# Altium PCB 学生电源.PcbDoc
Units mil, origin at the board's own origin, x right, y up, seen from the top; angles counter-clockwise.
Board outline 6000 x 4000 mil, 2 copper layers (Top Layer, Bottom Layer); 22 components, 9 nets, 50 pads, 0 vias.
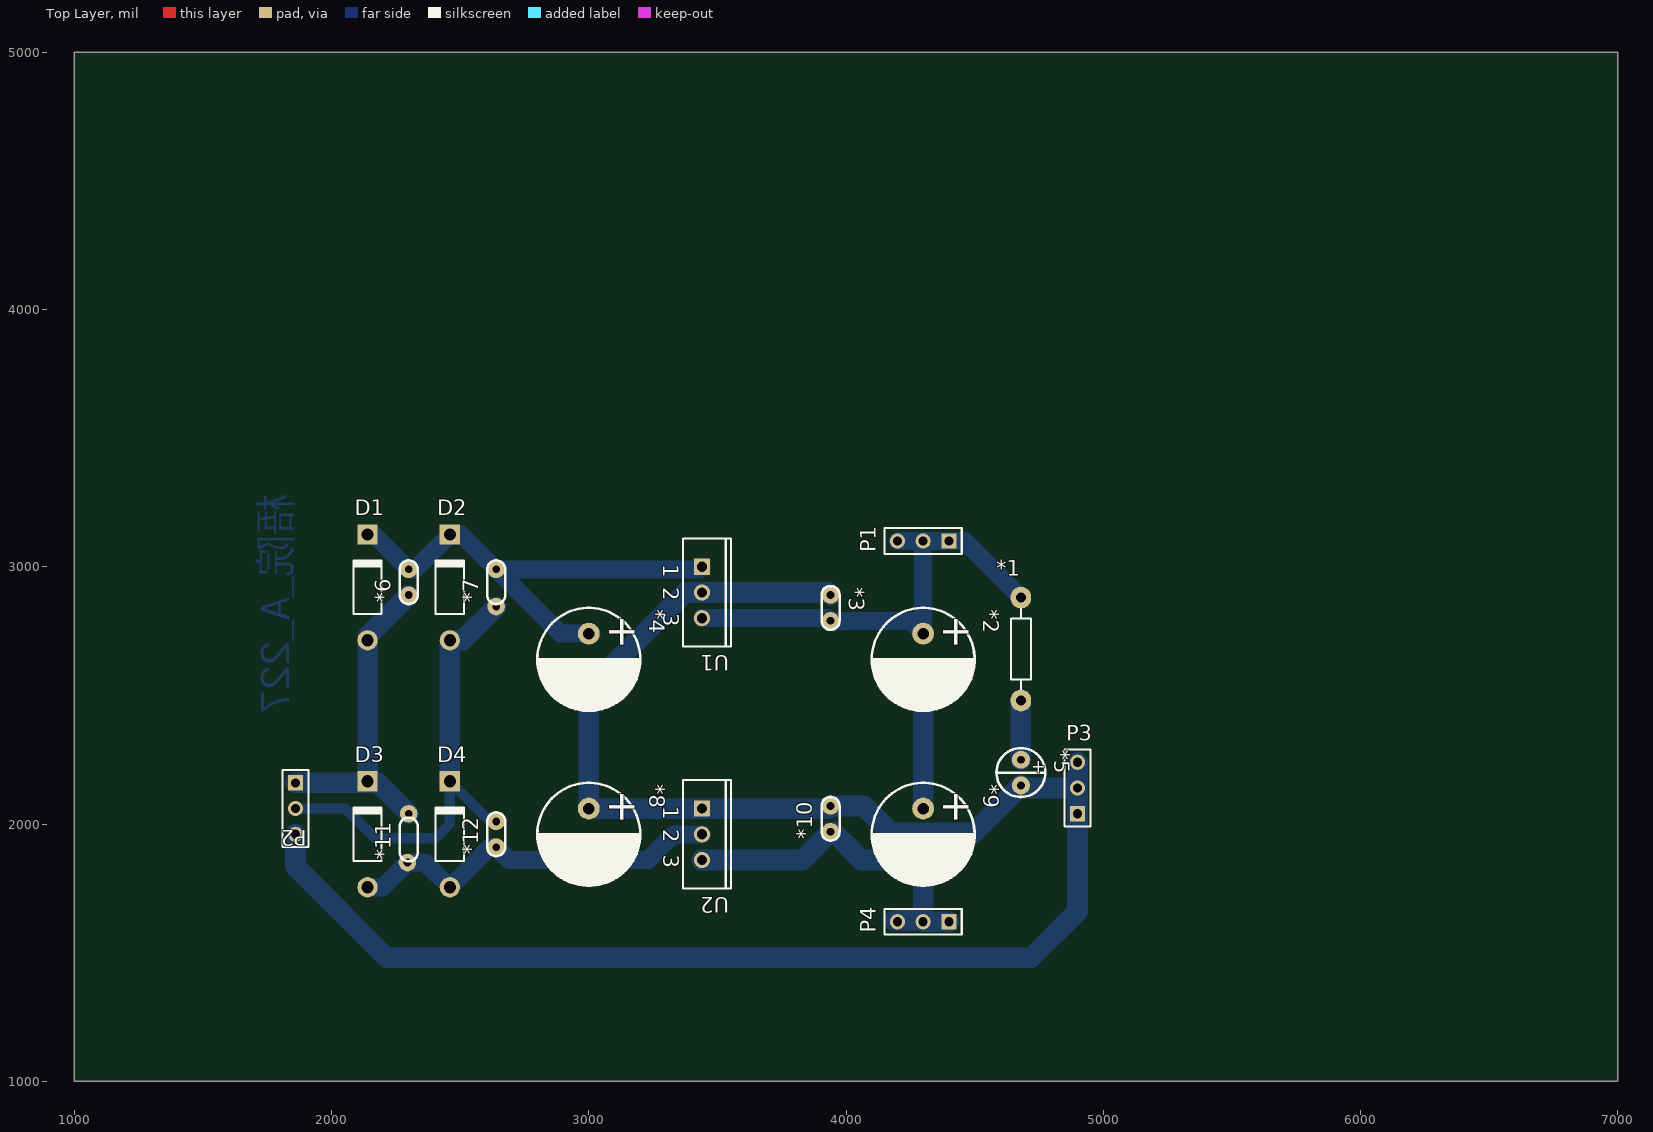
[diagram p0: Top Layer view]
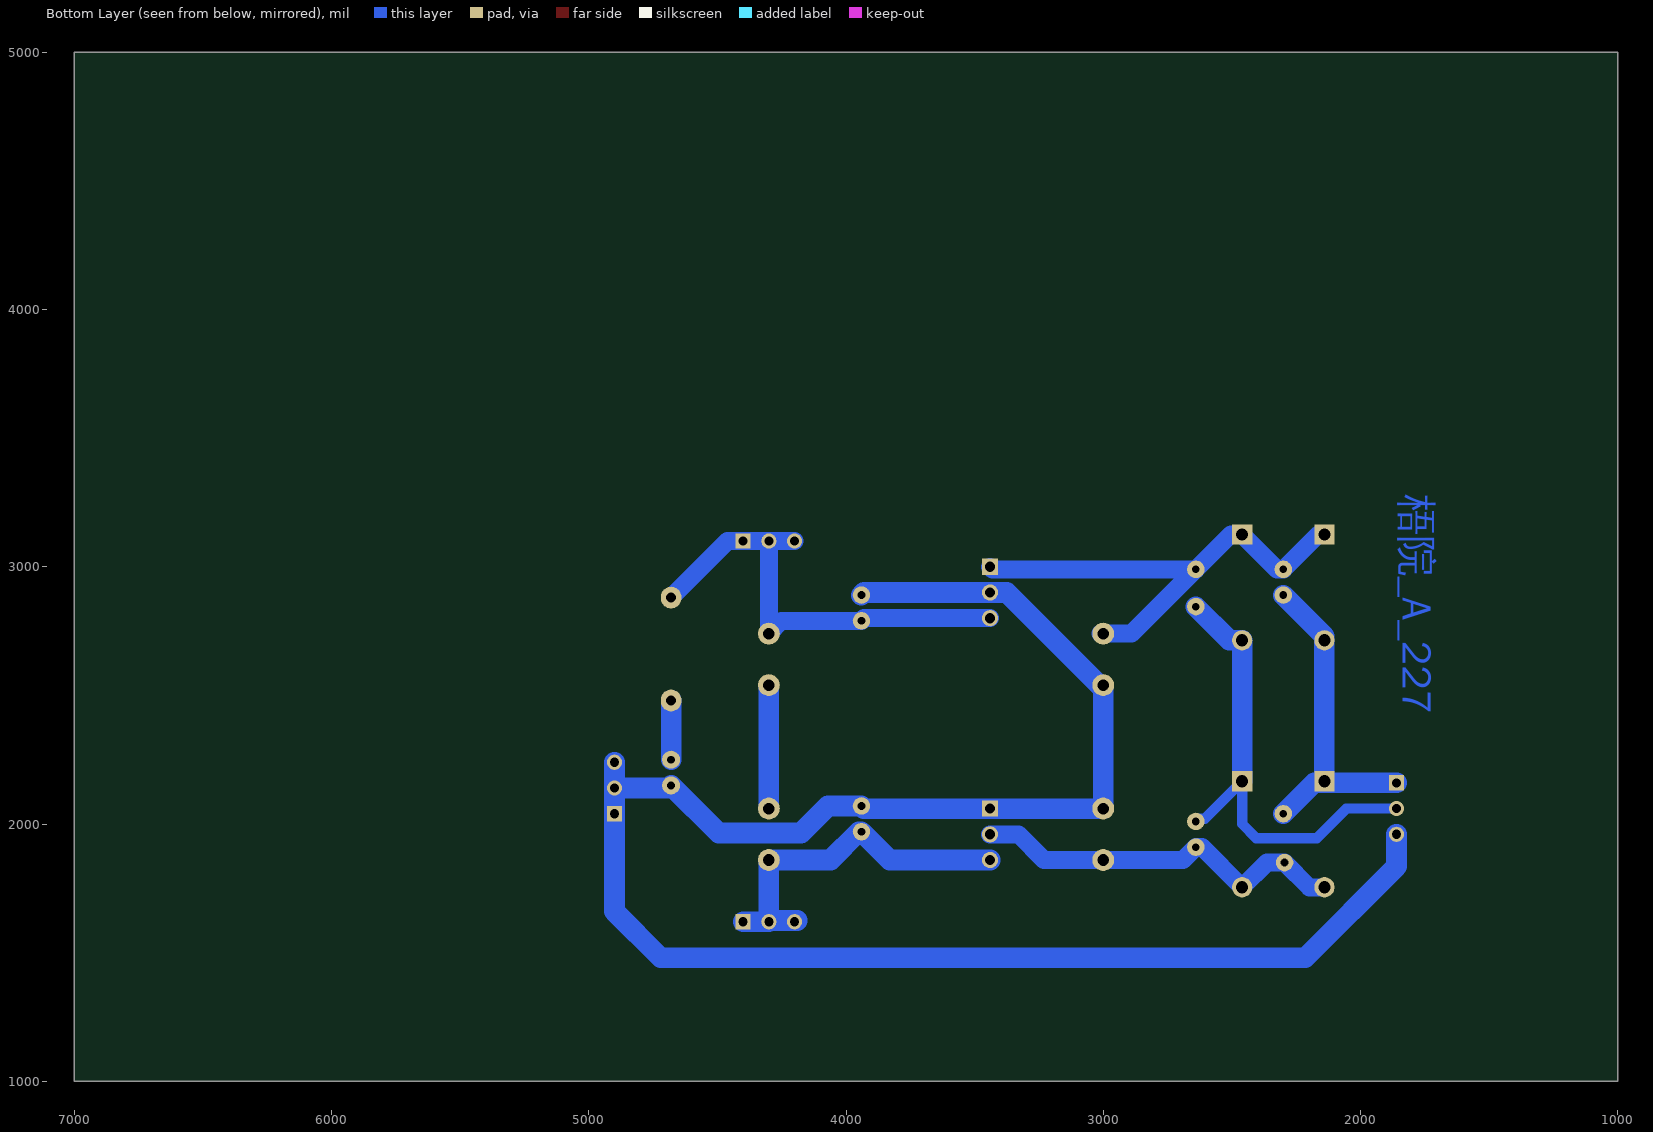
[diagram p1: Bottom Layer view, seen from below]

## Layer stack, top to bottom
Top Layer: signal copper 1.4
Dielectric: dielectric 12.6, FR-4, Dk 4.8
Bottom Layer: signal copper 1.4

## Board outline
1000,1000 7000,1000 7000,5000 1000,5000

## Design rules (kind name [scope] priority, off if disabled: settings)
Clearance [All] p1: gap=10
ComponentClearance [All] p1: gap=10 collisioncheckmode=3 verticalgap=10
PolygonConnect [All] p1: connectstyle=Relief reliefconductorwidth=10 reliefentries=4 polygonreliefangle="90 Angle"
RoutingVias [All] p1: holewidth=28 width=50 viastyle="Through Hole" minholewidth=28 minwidth=50 maxholewidth=28 maxwidth=50
SolderMaskExpansion [All] p1: expansion=4
TestPointUsage [All] p1: valid=0 allowmultiple=FALSE
Testpoint [All] p1: side=15 testpointundercomponent=TRUE minsize=40 maxsize=100 preferedsize=60 minholesize=0 maxholesize=40 preferedholesize=32 testpointgrid=1 style=1023 order=0-112345678
Width [All] p1: maxlimit=100 minlimit=10 preferedwidth=10 minimp=50.000000 maximp=50.000000 favimp=50.000000
18 further rules are at their usual default settings.

## Components (designator, comment, footprint, x,y, rotation, side; value= is the part's Value field where it differs from the comment)
*1 "R" RES 4680,2480 r90 top
*2 "C-DJ" 电解电容-10mm 4300,2640 r270 top
*3 "C-CP" 瓷片电容#1 3940,2840 r270 top
*4 "C-DJ" 电解电容-10mm 3000,2640 r270 top
*5 "LED-CS" LED-5 4680,2200 r270 top
*6 "C-CP" 瓷片电容#1 2300,2940 r90 top
*7 "C-CP" 瓷片电容#2 2640,2940 r90 top
*8 "C-DJ" 电解电容-10mm 3000,1960 r270 top
*9 "C-DJ" 电解电容-10mm 4300,1960 r270 top
*10 "C-CP" 瓷片电容#1 3940,2020 r90 top
*11 "C-CP" 瓷片电容#3 2300,1940 r90 top
*12 "C-CP" 瓷片电容#1 2640,1960 r90 top
D1 "Diode 1N4007" DO-41 2140,2920 r90 top
D2 "Diode 1N4007" DO-41 2460,2920 r90 top
D3 "Diode 1N4007" DO-41 2140,1960 r90 top
D4 "Diode 1N4007" DO-41 2460,1960 r90 top
P1 "Header 3" HDR1X3 4400,3100 r180 top
P2 "Header 3" HDR1X3 1860,2160 r270 top
P3 "Header 3" HDR1X3 4900,2040 r90 top
P4 "Header 3" HDR1X3 4400,1620 r180 top
U1 "LM7805CT" T03B 3440,2900 r270 top
U2 "LM7905CT" T03B 3440,1960 r270 top

## Footprints (in the part's own frame and the unit in brackets; to place one, negate y for a bottom-side part, rotate by r counter-clockwise, add the part's x,y. Pads: shape width x height; smd on the part's side, far side on the other; paste and mask are expansions set on the pad)
DO-41 [mm] "Diode, Axial; Body 5.2 x 2.7 mm (LxDia. max), Lead Dia. 0.86 mm (max)"
  round 2 hole 1.2: 1(-5.23,0)
  rect 2x2 hole 1.2: 2(5.23,0)
  silkscreen extent -2.65,-1.41 2.75,1.4
HDR1X3 [mm] "Connector; Header; 3 Position"
  rect 1.5x1.5 hole 0.9: 1(0,0)
  round 1.5 hole 0.9: 2(2.54,0) 3(5.08,0)
  silkscreen extent -1.27,-1.27 6.35,1.27
LED-5 [mil]
  round 70 hole 30: 1(-50,0) 2(50,0)
  silkscreen extent -95,-95 95,95
RES [mil]
  oval 85x80 hole 39.37: 1(0,0) 2(400,0)
  silkscreen extent 43,-39 357,39
T03B [mm] "TO, Thru-Hole, Vertical, Heatsink Mounted; 3 In-Line Leads; Pitch 2.54 mm"
  rect 1.6x1.6 hole 1: 1(-2.54,0)
  round 1.6 hole 1: 2(0,0) 3(2.54,0)
  silkscreen extent -5.35,-1.85 5.35,2.85
瓷片电容#1 [mil]
  round 68 hole 30: 1(-50,0) 2(50,0)
  silkscreen extent -85,-35 85,35
瓷片电容#2 [mil]
  round 68 hole 30: 1(-95,0) 2(50,0)
  silkscreen extent -85,-35 85,35
瓷片电容#3 [mil]
  round 68 hole 30: 1(-90,5) 2(100,0)
  silkscreen extent -85,-35 85,35
电解电容-10mm [mil]
  round 85 hole 45: 1(-100,0) 2(100,0)
  silkscreen extent -200,-200 200,200

## Part data
D1 D2 D3 D4: "1 Amp General Purpose Rectifier"
P1 P3 P4: "Header, 3-Pin"
P2: library part "Header 2", "Header, 2-Pin"
U1: "Series 3-Terminal Positive Regulator"
U2: "3-Terminal Negative Regulator"

## Nets (pads, with @x,y where several pads share a name; then routed paths per layer and width w, separated by ;. In a path a pad name is that pad's centre, name@x,y a point inside that pad or via, vN(x,y) a via of type N, cw(c..) or ccw(c..) an arc to the next point about the centre after c; other vN are vias at no path point)
GND: *3.1 *4.2 *5.2 *8.1 *10.2 P2.3 P3.1 P3.2 P3.3 U1.2 U2.1 | length 7574.5
  Bottom Layer w80: P2.3 1860,1835 2215,1480 4720,1480 4900,1660 P3.3 ; *4.2@3000,2525 3375,2900 3930,2900 *3.1 ; *4.2 *8.1 3930,2060 *10.2 4070,2070 4175,1965 4495,1965 *5.2 4690,2140 P3.2
Net*1_1: *1.1 *5.1 | length 230
  Bottom Layer w80: *5.1 *1.1
Net*1_2: *1.2 *2.1 *3.2 P1.1 P1.2 P1.3 U1.3 | length 1816
  Bottom Layer w70: U1.3 3930,2800 *3.2 4250,2790 *2.1 P1.2 ; P1.3 P1.2 ; *1.2 4460,3100 P1.1 P1.2
Net*2_2: *2.2 *9.1 | length 480
  Bottom Layer w80: *9.1 *2.2
Net*4_1: *4.1 *6.2 *7.2 D1.2 D2.2 U1.1 | length 1946.6
  Bottom Layer w70: D1.2 2164.09,3125.91 *6.2 2324.09,2990 D2.2 2504.09,3125.91 2890,2740 *4.1@3010,2740 ; *7.2 3430,2990 U1.1
Net*6_1: *6.1 *11.2 D1.1 D3.2 P2.1 | length 1288.4
  Bottom Layer w80: P2.1 2180,2160 *11.2 ; D3.2@2134.09,2160 D3.2 2140,2730 *6.1
Net*7_1: *7.1 *12.2 D2.1 D4.2 P2.2 | length 1849.2
  Bottom Layer w40: P2.2 2055,2060 2170,1945 2405,1945 2460,2000 D4.2 2605.91,2020 *12.2@2630,2020
  Bottom Layer w80: D4.2 D2.1 2509.09,2714.09 *7.1
Net*8_2: *8.2 *11.1 *12.1 D3.1 D4.1 U2.2 | length 1506.2
  Bottom Layer w70: D3.1 2199.09,1754.09 *11.1 2364.09,1850 D4.1 2615.91,1910 *12.1 2690,1860 *8.2 3230,1860 3330,1960 U2.2
Net*9_2: *9.2 *10.1 P4.1 P4.2 P4.3 U2.3 | length 1403.2
  Bottom Layer w80: U2.3 3830,1860 *10.1 3950,1970 4060,1860 *9.2 P4.2 ; P4.3@4190,1625 4295,1625 P4.2 ; P4.1 P4.2

## Other copper
Bottom Layer:
  text "梧院_A_227" at 1875,3280 h200 r90

## Silkscreen, mask and mechanical layers (free items; w line width, h text height)
Mechanical 1:
  lines w20: 4575,3310 1680,3310 1680,1655 1980,1355 4880,1355 5025,1500 5025,2880 4585,3320

## Text inside footprints (layer, text, board x,y; h text height)
*2: Top Overlay "+" at 4340,2680 h200 r270
*4: Top Overlay "+" at 3040,2680 h200 r270
*5: Top Overlay "+" at 4720,2200 h50
*8: Top Overlay "+" at 3040,2000 h200 r270
*9: Top Overlay "+" at 4340,2000 h200 r270
U1: Top Overlay "2" at 3289.41,2919.68 h59.06 r270; Top Overlay "1" at 3289.41,3009.84 h59.06 r270; Top Overlay "3" at 3289.41,2819.68 h59.06 r270
U2: Top Overlay "2" at 3289.41,1979.68 h59.06 r270; Top Overlay "1" at 3289.41,2069.84 h59.06 r270; Top Overlay "3" at 3289.41,1879.68 h59.06 r270